# Altium PCB NetworkModule_highspeed V3.PcbDoc (part 1 of 3)
Units mm, origin at the board's own origin, x right, y up, seen from the top; angles counter-clockwise.
Board outline 21 x 36.1 mm, 6 copper layers (Top, GND, Inner3, Inner4, PWR, Bottom), stack 0.74 mm thick; 111 components, 125 nets, 539 pads, 397 vias.
Unrouted connection lines stored in the file: 274.
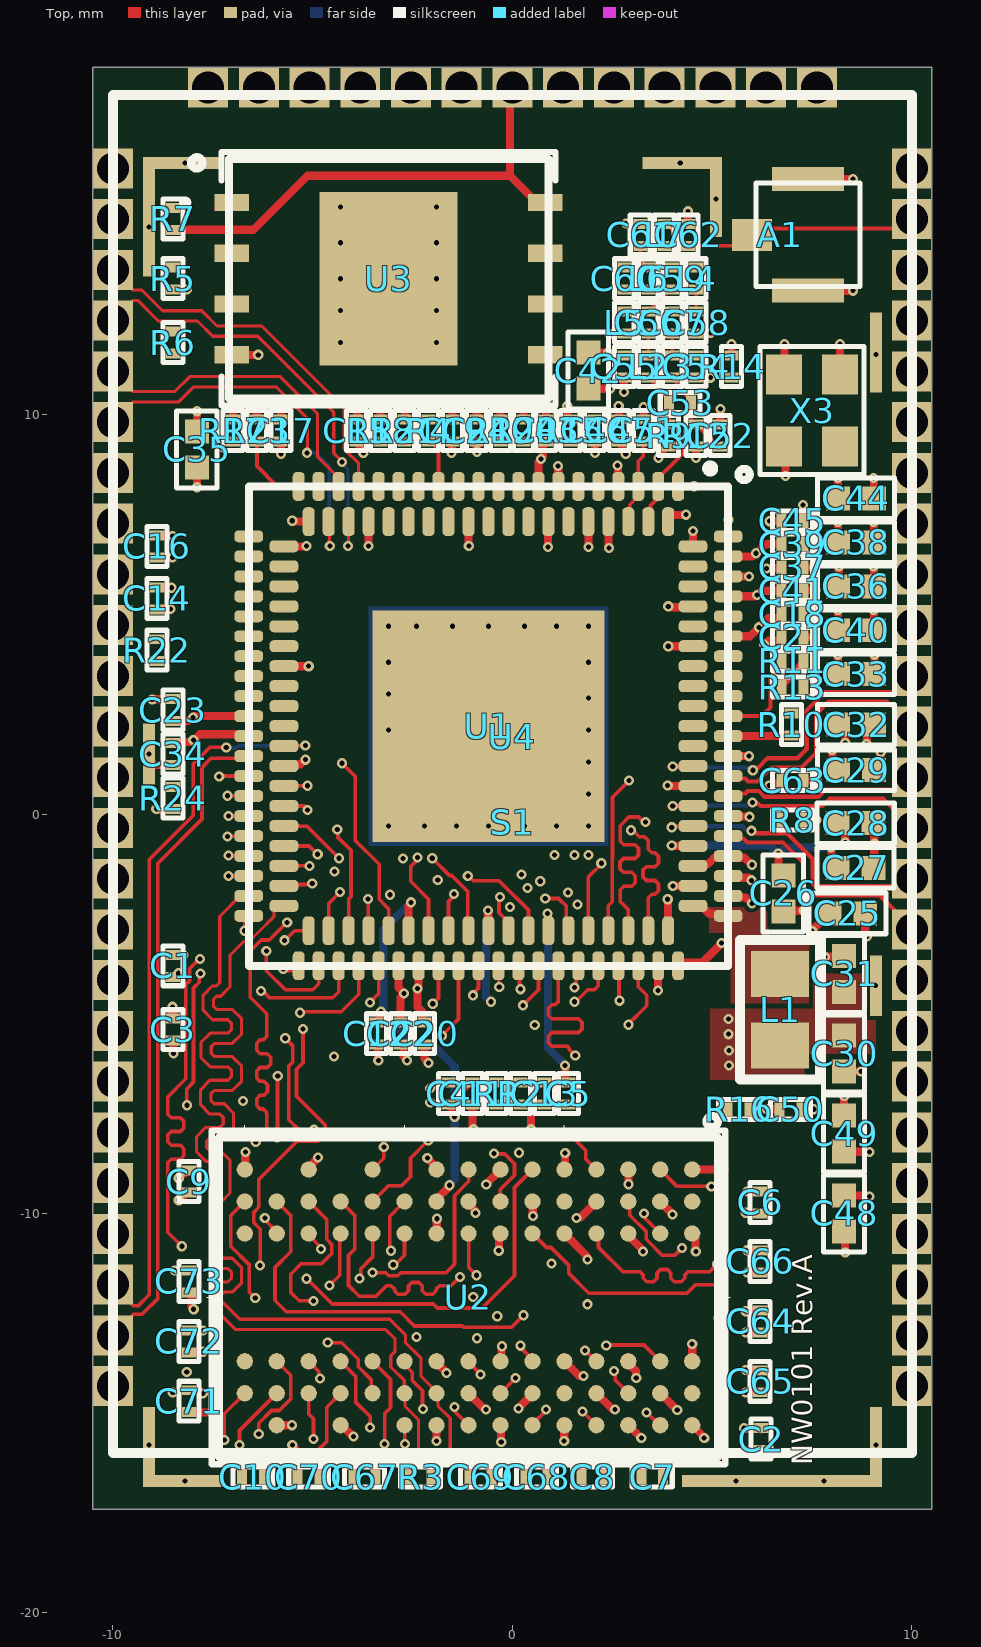
[diagram p0: Top view]
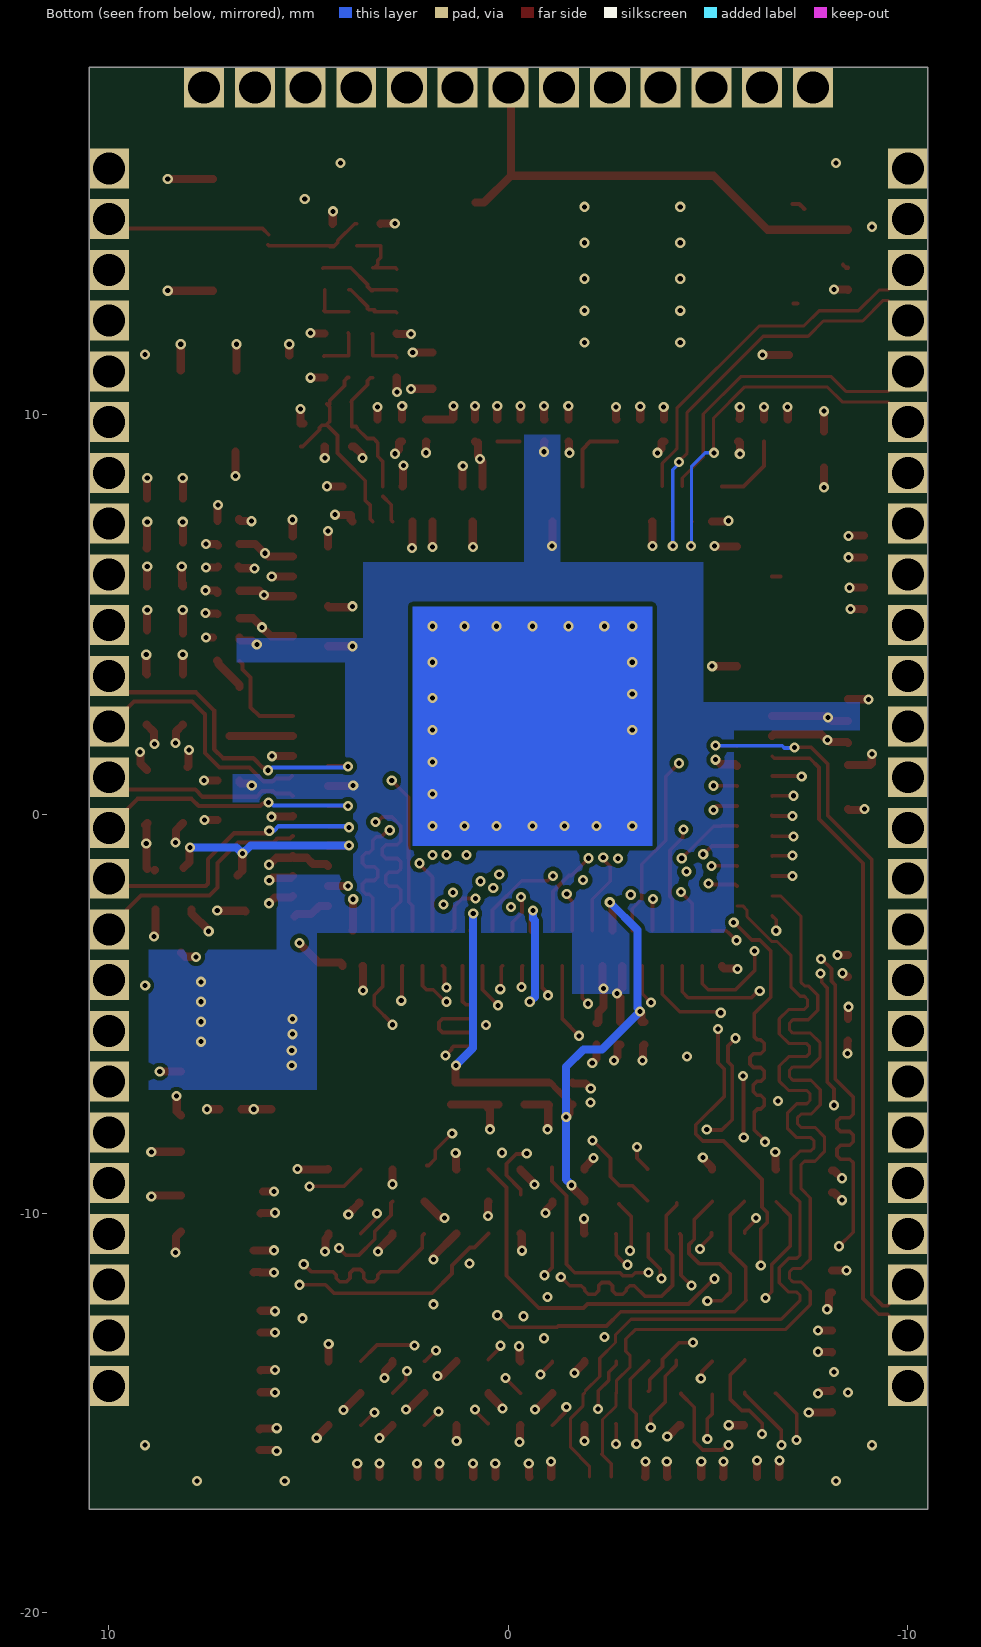
[diagram p1: Bottom view, seen from below]
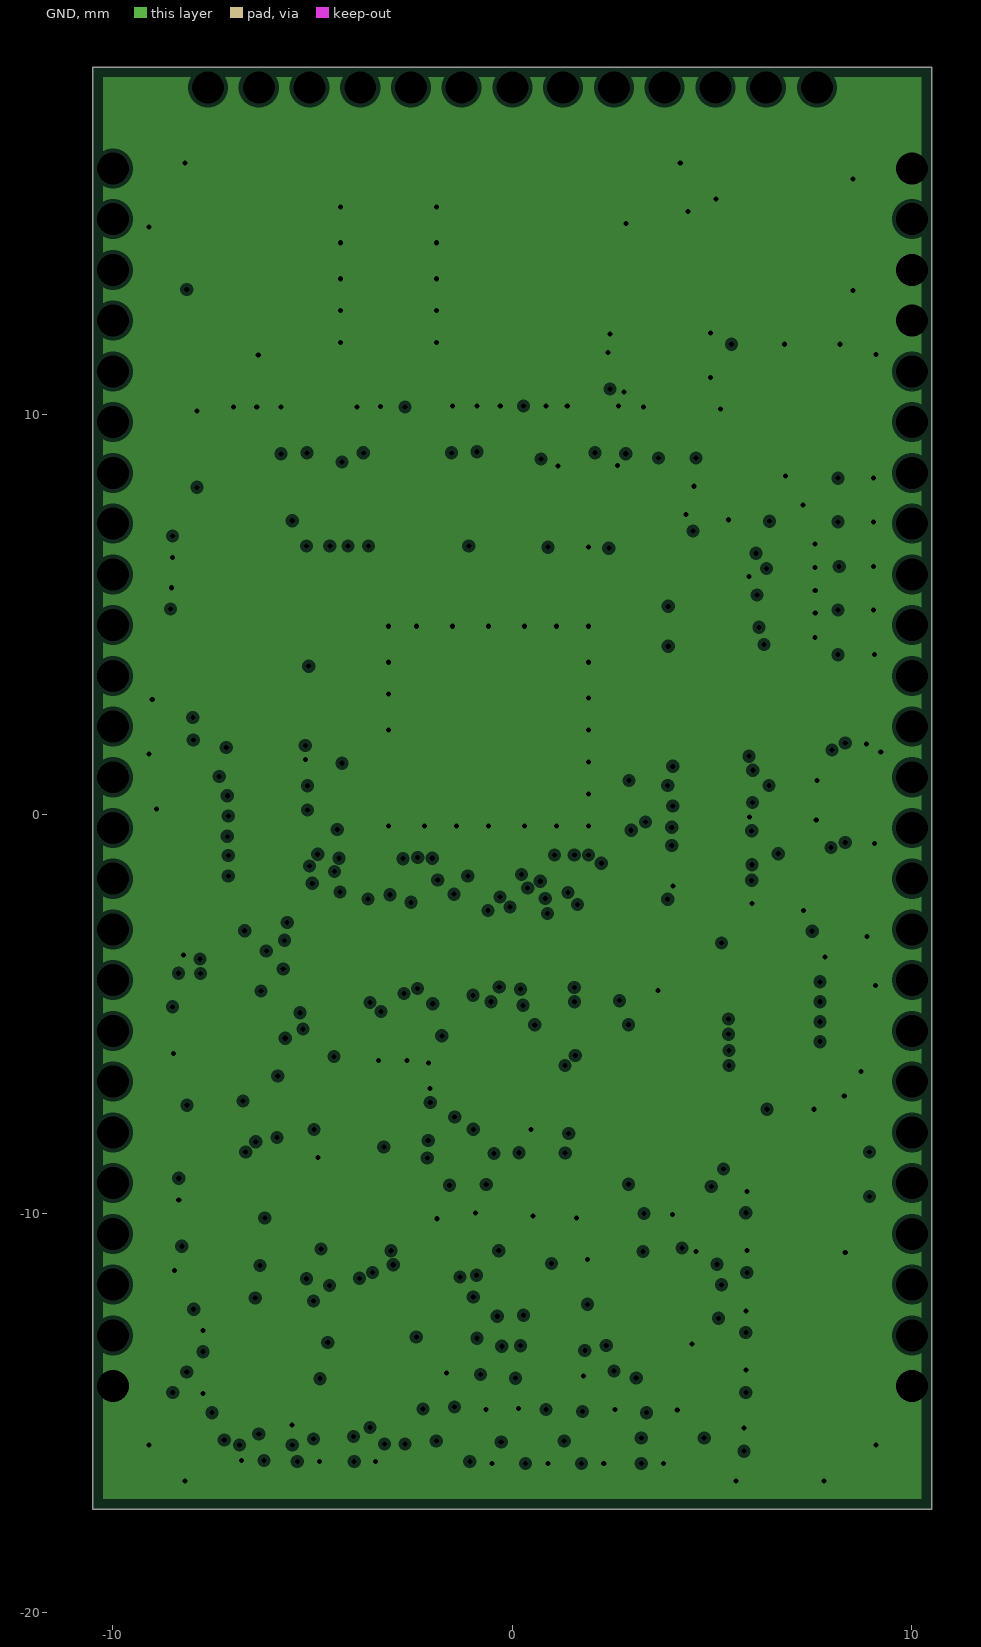
[diagram p2: GND, clearances drawn from the general rule]
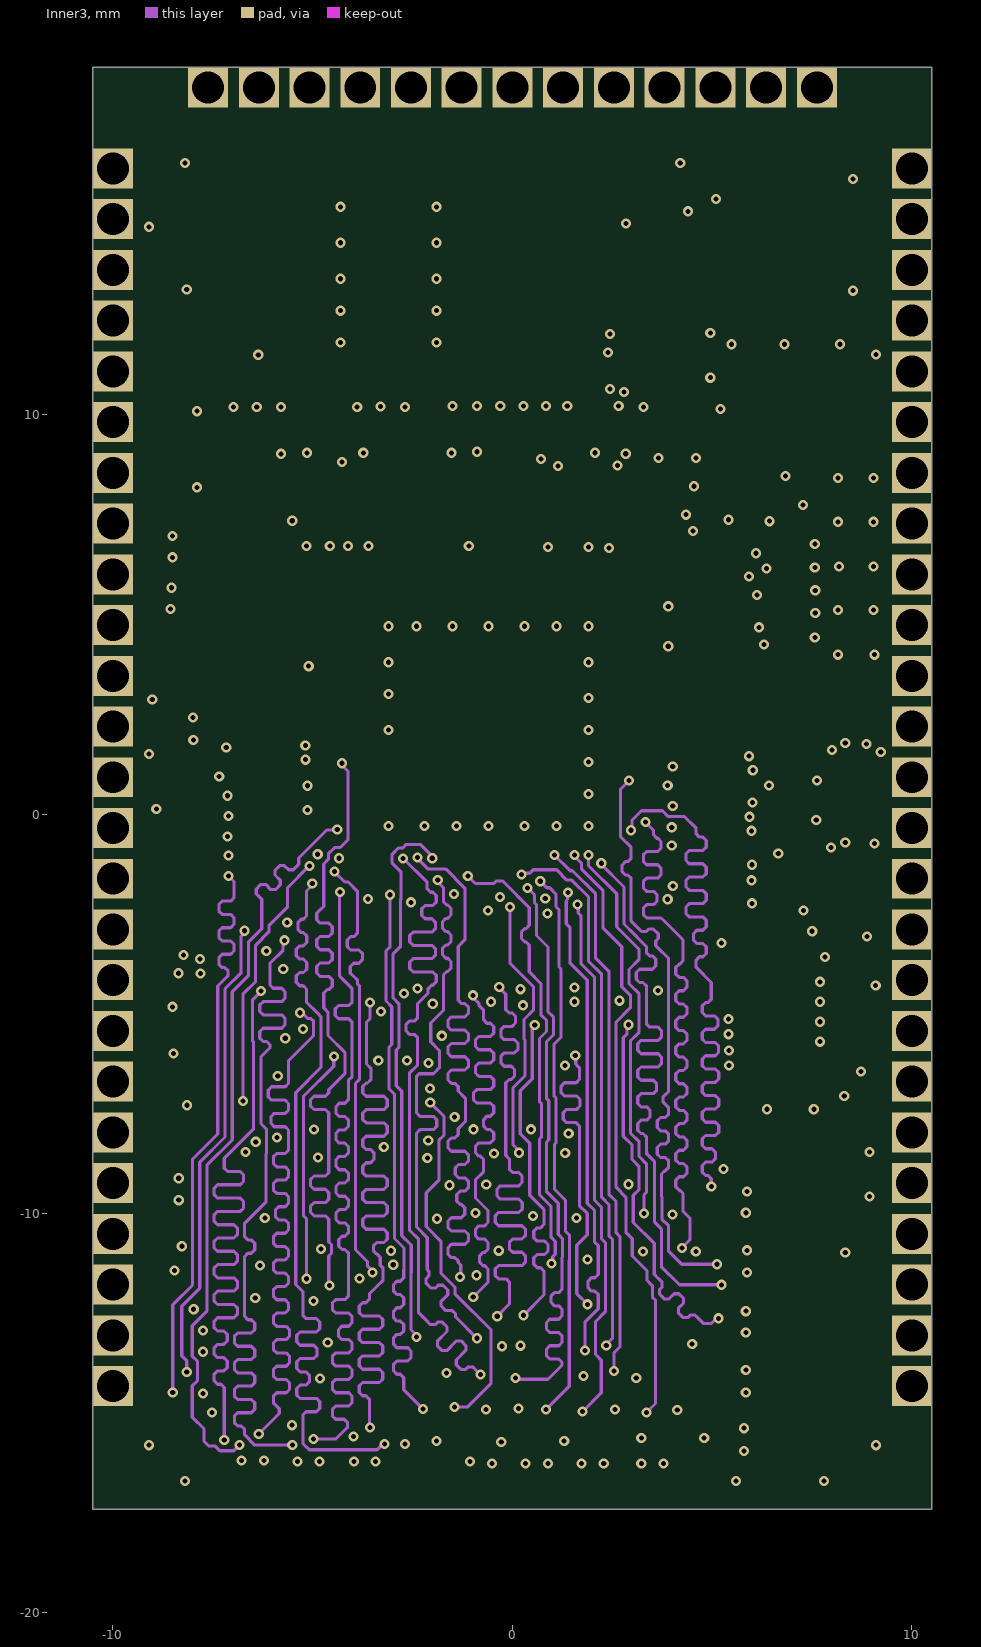
[diagram p3: Inner3]
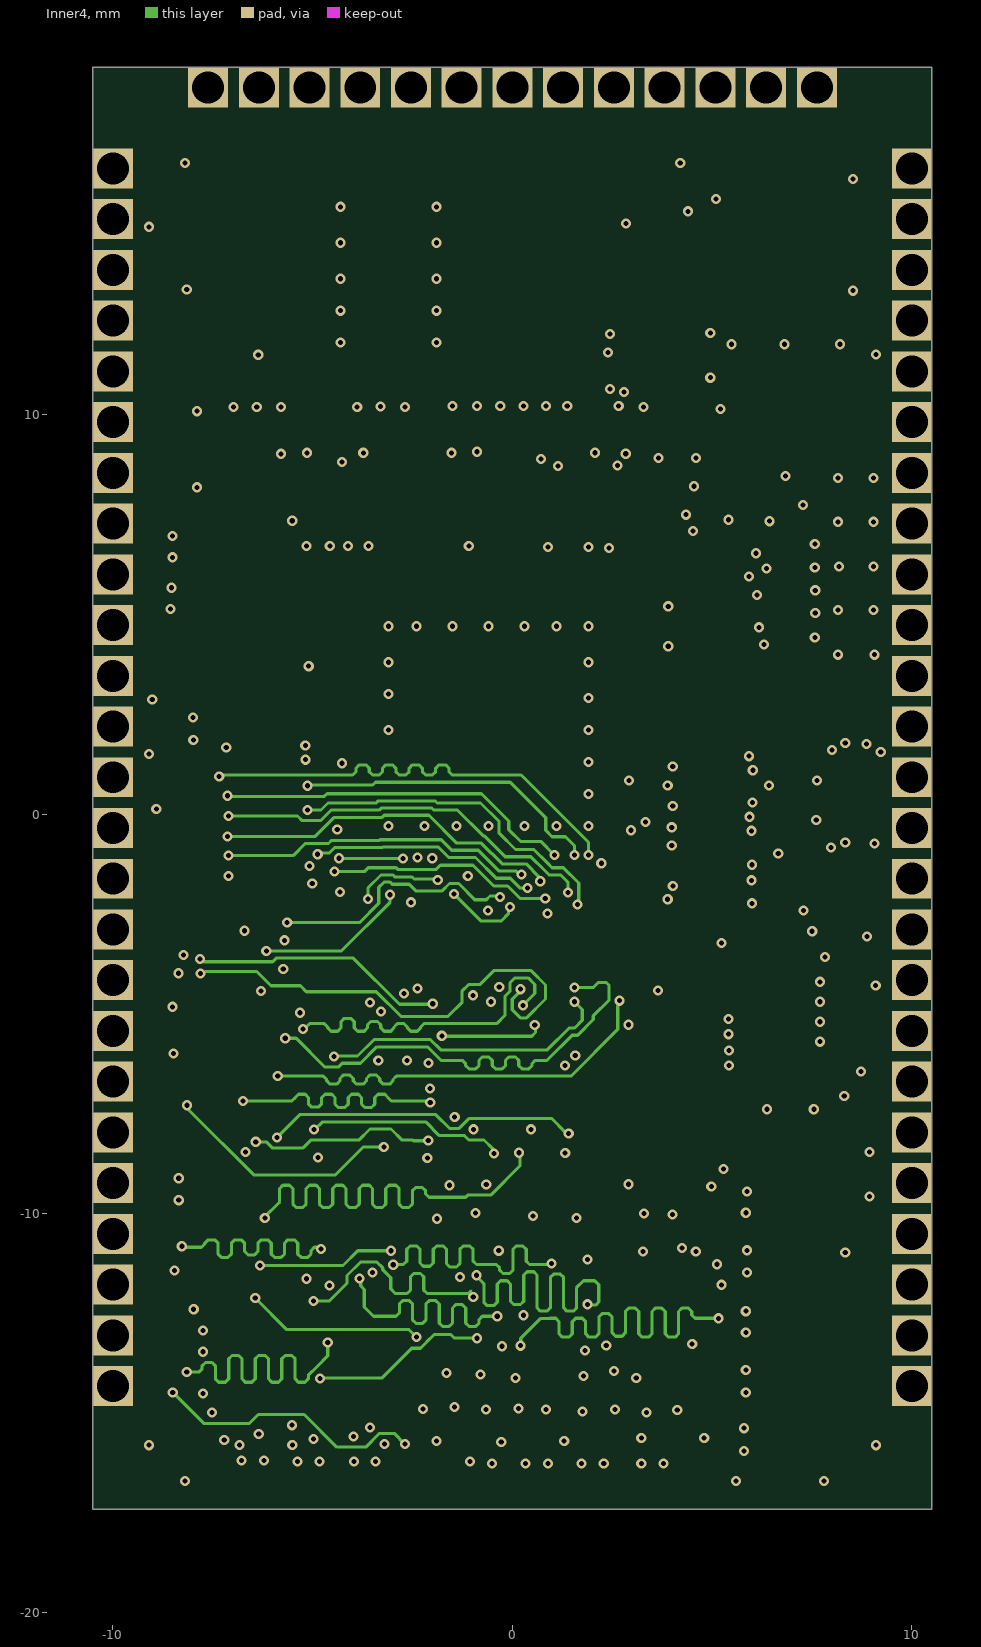
[diagram p4: Inner4]
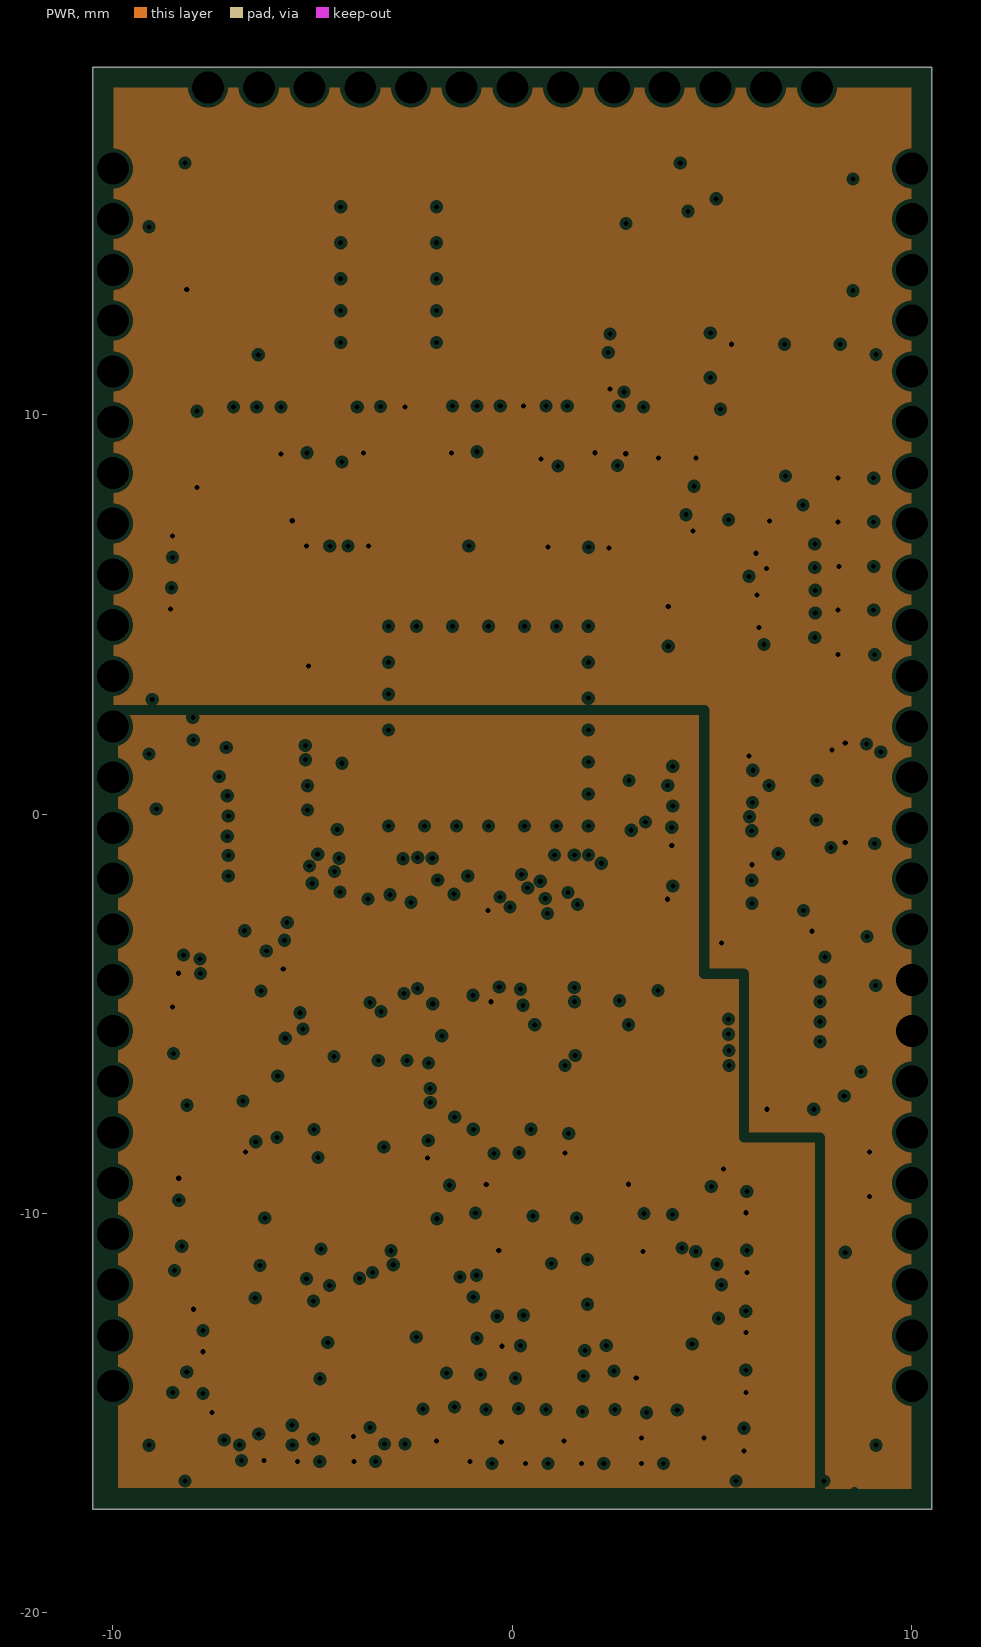
[diagram p5: PWR, clearances drawn from the general rule]

## Layer stack, top to bottom
Solder Mask Top: solder mask 0.0102, Solder Resist, Dk 3.5
Top: signal copper 0.0343
Dielectric 1: dielectric 0.06, FR-4, Dk 4.3
GND: plane copper 0.035, net GND
Dielectric2: dielectric 0.0787, FR-4, Dk 4.3
Inner3: signal copper 0.035
Dielectric3: dielectric 0.254, FR-4, Dk 4.3
Inner4: signal copper 0.035
Dielectric4: dielectric 0.0787, FR-4, Dk 4.3
PWR: plane copper 0.035, net 3V3
Dielectric5: dielectric 0.06, FR-4, Dk 4.3
Bottom: signal copper 0.0343
Solder Mask Bottom: solder mask 0.0102, Solder Resist, Dk 3.5

## Board outline
-10.5,18.7 10.5,18.7 10.5,-17.4 -10.5,-17.4

## Design rules (kind name [scope] priority, off if disabled: settings)
BoardOutlineClearance [All] p1: gap=0.102 ignorepadtopadclearanceinfootprint=FALSE
Clearance "Clearance - Default - DEFAULT - Net" [All] p1: gap=0.102 ignorepadtopadclearanceinfootprint=FALSE
ComponentClearance [All] p1: gap=0 collisioncheckmode=3 verticalgap=0 showdistances=FALSE
DiffPairsRouting "DiffPairsRouting - DiffPair - DDRCLK" [InDifferentialPair('DDRCLK')] p1: maxlimit=0.178 minlimit=0.127 mostfreqgap=0.127 toplayer_mingap=0.178 toplayer_prefgap=0.178 toplayer_minwidth=0.079 toplayer_maxwidth=0.079 toplayer_prefwidth=0.079 impedanceprofiledriven=TRUE impedanceprofileid={2A60CAE8-979D-4617-9CAD-F7D18D3C7651} impedanceprofilevalue=100.000000 maxuncoupledlength=12.7
DiffPairsRouting "DiffPairsRouting - DiffPair - ETH_R" [InDifferentialPair('ETH_R') or InDifferentialPair('ETH_T')] p2: maxlimit=0.178 minlimit=0.127 mostfreqgap=0.178 toplayer_mingap=0.178 toplayer_minwidth=0.079 toplayer_maxwidth=0.079 toplayer_prefwidth=0.079 bottomlayer_mingap=0.178 bottomlayer_minwidth=0.079 bottomlayer_maxwidth=0.079 bottomlayer_prefwidth=0.079 impedanceprofiledriven=TRUE impedanceprofileid={F7A5DDC0-C5B1-46B8-8866-6746753CC466} impedanceprofilevalue=100.000000 maxuncoupledlength=12.7
DiffPairsRouting "DiffPairsRouting - DiffPair - USB_D" [InDifferentialPair('USB')] p3: maxlimit=0.127 minlimit=0.114 mostfreqgap=0.127 toplayer_mingap=0.127 toplayer_minwidth=0.091 toplayer_maxwidth=0.091 toplayer_prefwidth=0.091 impedanceprofiledriven=TRUE impedanceprofileid={C5FCCC38-FD2C-4A72-8F5C-545B132D70D5} impedanceprofilevalue=90.000000 maxuncoupledlength=12.7
DiffPairsRouting "DiffPairsRouting - DiffPair - PCIE" [InDifferentialPair('PCIE_R') or InDifferentialPair('PCIE_T') or InDifferentialPair('PCIE_CLK')] p4: maxlimit=0.127 minlimit=0.102 mostfreqgap=0.127 toplayer_mingap=0.127 toplayer_minwidth=0.104 toplayer_maxwidth=0.104 toplayer_prefwidth=0.104 bottomlayer_mingap=0.127 bottomlayer_minwidth=0.104 bottomlayer_maxwidth=0.104 bottomlayer_prefwidth=0.104 impedanceprofiledriven=TRUE impedanceprofileid={683894AC-71DA-4711-AA13-E03A25D4E6CD} impedanceprofilevalue=85.000000 maxuncoupledlength=12.7
HoleSize [All] p1: absolutevalues=TRUE maxlimit=2.54 minlimit=0.127 maxpercent=80.000 minpercent=20.000
HoleToHoleClearance "HoleToHoleClearance - Default - DEFAULT" [All] p1: gap=0.102 allowstackedmicrovias=TRUE
MatchedLengths [InNetClass('DDR')] p1: tolerance=2.54 checknetsindiffpair=FALSE checkdiffpairvsdiffpair=TRUE checkxsignals=TRUE checkothers=TRUE
MinimumSolderMaskSliver [All] p1: minsoldermaskwidth=0.076
PlaneClearance [All] p1: clearance=0.102
PlaneConnect "Default PlaneConnect" [All] p1: planeconnectstyle=Direct reliefexpansion=0.508 reliefentries=4 reliefconductorwidth=0.381 reliefairgap=0.254
PolygonConnect "PolygonConnect - Default SMT" [IsSMTPin] p1: connectstyle=Direct reliefconductorwidth=0.254 reliefentries=4 polygonreliefangle="45 Angle" airgapwidth=0.254
PolygonConnect "PolygonConnect - Default Pad" [All] p2: connectstyle=Direct reliefconductorwidth=0.381 reliefentries=4 polygonreliefangle="45 Angle" airgapwidth=0.254
ReturnPath "ReturnPath - DDRCLK" [InNetClass('DDRCLK')] p1: impedanceprofileid={2A60CAE8-979D-4617-9CAD-F7D18D3C7651} _gaplimit=0
ReturnPath ReturnPath-DDR [All] p2: impedanceprofileid={722ABB41-7FFB-403E-9E2B-BB6A49F0BD66} _gaplimit=0
ReturnPath "ReturnPath - RF" [All] p3: impedanceprofileid={3401BA53-1A97-405B-B9A4-8C0F8181F371} _gaplimit=0
ReturnPath "ReturnPath - USB" [All] p4: impedanceprofileid={C5FCCC38-FD2C-4A72-8F5C-545B132D70D5} _gaplimit=0
ReturnPath "ReturnPath - PCIE" [All] p5: impedanceprofileid={683894AC-71DA-4711-AA13-E03A25D4E6CD} _gaplimit=0
ReturnPath "ReturnPath - Eth" [InNetClass('ETH')] p6: impedanceprofileid={F7A5DDC0-C5B1-46B8-8866-6746753CC466} _gaplimit=0.127
RoutingLayers "RoutingLayers - USB" [InNetClass('USB')] p1: top layer_v5=TRUE mid layer 1_v5=FALSE mid layer 2_v5=FALSE bottom layer_v5=TRUE
RoutingLayers "RoutingLayers - PCIE" [InNetClass('PCIE')] p2: top layer_v5=TRUE mid layer 1_v5=FALSE mid layer 2_v5=FALSE bottom layer_v5=TRUE
RoutingLayers "RoutingLayers - DDRCLK" [InNetClass('DDRCLK')] p3: top layer_v5=TRUE mid layer 1_v5=TRUE mid layer 2_v5=TRUE bottom layer_v5=TRUE
RoutingLayers "RoutingLayers - NetClass - RF" [InNetClass('RF')] p4: top layer_v5=TRUE mid layer 1_v5=FALSE mid layer 2_v5=FALSE bottom layer_v5=FALSE
RoutingLayers "RoutingLayers - NetClass - DDR" [InNetClass('DDR')] p5: top layer_v5=TRUE mid layer 1_v5=TRUE mid layer 2_v5=TRUE bottom layer_v5=TRUE
RoutingLayers "RoutingLayers - ETH" [InNetClass('ETH')] p6: top layer_v5=TRUE mid layer 1_v5=FALSE mid layer 2_v5=FALSE bottom layer_v5=TRUE
RoutingLayers "RoutingLayers - NetClass - Power" [InNetClass('Power')] p7: top layer_v5=TRUE mid layer 1_v5=FALSE mid layer 2_v5=FALSE bottom layer_v5=TRUE
RoutingLayers "RoutingLayers - Net - GND" [InNet('GND')] p8: top layer_v5=TRUE mid layer 1_v5=FALSE mid layer 2_v5=FALSE bottom layer_v5=FALSE
RoutingLayers "RoutingLayers - Default" [All] p9: top layer_v5=TRUE mid layer 1_v5=TRUE mid layer 2_v5=TRUE bottom layer_v5=TRUE
RoutingPriority "RoutingPriority - PCIE" [InNetClass('PCIE')] p1: routingpriority=5
RoutingPriority "RoutingPriority - USB" [InNetClass('USB')] p2: routingpriority=5
RoutingPriority "RoutingPriority - ETH" [InNetClass('ETH')] p3: routingpriority=5
RoutingPriority "RoutingPriority - DDRCLK" [InNetClass('DDRCLK')] p4: routingpriority=5
RoutingPriority "RoutingPriority - DDR" [InNetClass('DDR')] p5: routingpriority=3
RoutingPriority "RoutingPriority - Default" [All] p6: routingpriority=0
RoutingVias "RoutingVias - Default" [All] p1: holewidth=0.102 width=0.254 viastyle="Through Hole" minholewidth=0.102 minwidth=0.254 maxholewidth=0.102 maxwidth=0.254
SolderMaskExpansion "SolderMaskExpansion from CAM settings" [All] p1: expansion=0.051 istentingtop=FALSE
Width "Width - NetClass -RF" [InNetClass('RF')] p1: maxlimit=0.152 minlimit=0.076 preferedwidth=0.254 toplayer_prefwidth=0.092 impedanceprofiledriven=TRUE impedanceprofileid={3401BA53-1A97-405B-B9A4-8C0F8181F371} impedanceprofilevalue=50.000000 minimp=50.000000 maximp=50.000000 favimp=50.000000
Width "Width - NetClass - DDR" [InNetClass('DDR')] p2: maxlimit=0.152 minlimit=0.076 preferedwidth=0.092 toplayer_minwidth=0.092 toplayer_maxwidth=0.092 midlayer1_minwidth=0.079 midlayer1_maxwidth=0.079 midlayer1_prefwidth=0.079 midlayer2_minwidth=0.078 midlayer2_maxwidth=0.078 midlayer2_prefwidth=0.078 impedanceprofiledriven=TRUE impedanceprofileid={722ABB41-7FFB-403E-9E2B-BB6A49F0BD66} impedanceprofilevalue=50.000000 minimp=50.000000 maximp=50.000000 favimp=50.000000
Width "Width - Net - GND" [InNet('GND')] p3: maxlimit=0.254 minlimit=0.102 preferedwidth=0.203 minimp=50.000000 maximp=50.000000 favimp=50.000000
Width "Width - NetClass - Power" [InNetClass('Power')] p4: maxlimit=0.254 minlimit=0.102 preferedwidth=0.203 minimp=50.000000 maximp=50.000000 favimp=50.000000
Width "Width - DEFAULT" [All] p5: maxlimit=0.254 minlimit=0.076 preferedwidth=0.102 minimp=50.000000 maximp=50.000000 favimp=50.000000
21 further rules are at their usual default settings.

## Classes and differential pairs
component class BGA: U2
net class DDRCLK: DDR_CLK_N DDR_CLK_P
net class ETH: ETH_RN ETH_RP ETH_TN ETH_TP
net class PCIE: PCIE_CKN PCIE_CKP PCIE_RXN PCIE_RXP PCIE_TXN PCIE_TXP
net class USB: USB_D+ USB_D-
net class DDR: DDR_A0 DDR_A1 DDR_A2 DDR_A3 DDR_A4 DDR_A5 DDR_A6 DDR_A7 DDR_A8 DDR_A9 DDR_A10 DDR_A11 DDR_A12 DDR_A13 DDR_BA0 DDR_BA1 DDR_BA2 DDR_CAS DDR_CKE DDR_CS DDR_D0 DDR_D1 DDR_D2 DDR_D3 DDR_D4 DDR_D5 DDR_D6 DDR_D7 DDR_D8 DDR_D9 DDR_D10 DDR_D11 DDR_D12 DDR_D13 DDR_D14 DDR_D15 DDR_LDM DDR_LDQS DDR_ODT DDR_RAS DDR_UDM DDR_UDQS DDR_WE
net class RF: ANT_OUT RF_DIFF+ RF_DIFF- RF_HP+ RF_HP- RF_LP RF_LP+ RF_LP- RF_NOTCH
net class Power: 1V2 1V8 3V3 DDR_1V8 DDR_VREF LXBK VDD_FLASH
component class WIFI: A1 C36 C37 C38 C39 C40 C41 C42 C43 C44 C45 C46 C47 C48 C49 C50 C51 C52 C53 C54 C55 C56 C57 C58 C59 C60 C61 C62 L2 L3 L4 L5 L6 L7 R9 R12 X3
component class USB_PCIE: C32 C33 C34 C35 C63 R16 R24
component class POWER: C18 C19 C20 C21 C22 C23 C24 C25 C27 C28 C29 C30 C31 L1 U1
component class MISC: R4 R5 R7 R8 R10 R11 R13 R14 R15 R17 R18 R19 R20 R21 U3
component class MEMORY: C1 C2 C3 C5 C6 C7 C8 C9 C10 C11 C64 C65 C66 C67 C68 C69 C70 C71 C72 C73 R1 R2 R3 U2
component class INTERFACE: U4
component class ETH_JTAG_SD: C14 C15 C16 C17 R22 R23
differential pair PCIE_CLK: +PCIE_CKP -PCIE_CKN
differential pair PCIE_R: +PCIE_RXP -PCIE_RXN
differential pair PCIE_T: +PCIE_TXP -PCIE_TXN
differential pair DDRCLK: +DDR_CLK_P -DDR_CLK_N
differential pair ETH_R: +ETH_RP -ETH_RN
differential pair ETH_T: +ETH_TP -ETH_TN
differential pair USB: +USB_D+ -USB_D-

## Components (designator, comment, footprint, x,y, rotation, side; value= is the part's Value field where it differs from the comment)
A1 "CONMHF1-SMD-G-T" CONMHF1-SMD-G-T 7.4,14.5 r0 top locked
C1 "CAP0201-104-16V-X7R" RC0201 -8.5,-3.8 r90 top value="0.1uF 16V X7R"
C2 "CAP0201-104-16V-X7R" RC0201 6.225,-15.65 r90 top value="0.1uF 16V X7R"
C3 "CAP0201-104-16V-X7R" RC0201 -8.5,-5.4 r270 top value="0.1uF 16V X7R"
C4 "CAP0201-104-16V-X7R" RC0201 -1.6,-7 r90 top value="0.1uF 16V X7R"
C5 "CAP0201-104-16V-X7R" RC0201 1.4,-7 r270 top value="0.1uF 16V X7R"
C6 "CAP0201-104-16V-X7R" RC0201 6.2,-9.725 r90 top value="0.1uF 16V X7R"
C7 "CAP0201-104-16V-X7R" RC0201 3.5,-16.6 r0 top value="0.1uF 16V X7R"
C8 "CAP0201-104-16V-X7R" RC0201 2,-16.6 r0 top value="0.1uF 16V X7R"
C9 "CAP0201-104-16V-X7R" RC0201 -8.1,-9.2 r270 top value="0.1uF 16V X7R"
C10 "CAP0201-104-16V-X7R" RC0201 -6.5,-16.6 r180 top value="0.1uF 16V X7R"
C11 "CAP0201-104-16V-X7R" RC0201 -1,-7 r90 top value="0.1uF 16V X7R"
C12 "CAP0201-104-16V-X7R" RC0201 -3.4,-5.5 r270 top value="0.1uF 16V X7R"
C13 "CAP0201-104-16V-X7R" RC0201 0.8,-7 r270 top value="0.1uF 16V X7R"
C14 "CAP0201-104-16V-X7R" RC0201 -8.9,5.4 r90 top value="0.1uF 16V X7R"
C15 "CAP0201-104-16V-X7R" RC0201 -3.9,9.6 r90 top value="0.1uF 16V X7R"
C16 "CAP0201-104-16V-X7R" RC0201 -8.9,6.7 r270 top value="0.1uF 16V X7R"
C17 "CAP0201-104-16V-X7R" RC0201 -5.8,9.6 r90 top value="0.1uF 16V X7R"
C18 "CAP0201-104-16V-X7R" RC0201 7.01,5.004 r0 top value="0.1uF 16V X7R"
C19 "CAP0201-104-16V-X7R" RC0201 -1.5,9.6 r90 top value="0.1uF 16V X7R"
C20 "CAP0201-104-16V-X7R" RC0201 -2.2,-5.5 r270 top value="0.1uF 16V X7R"
C21 "CAP0201-104-16V-X7R" RC0201 7.01,4.42 r0 top value="0.1uF 16V X7R"
C22 "CAP0201-104-16V-X7R" RC0201 -2.8,-5.5 r270 top value="0.1uF 16V X7R"
C23 "CAP0201-104-16V-X7R" RC0201 -8.5,2.6 r90 top value="0.1uF 16V X7R"
C24 "CAP0201-104-16V-X7R" RC0201 -0.9,9.6 r90 top value="0.1uF 16V X7R"
C25 "CAP0402-105-6.3V-X7R" RC0402 8.382,-2.489 r0 top value="1uF 16V X7R"
C26 "CAP0402-475-10V-X5R" RC0402 6.782,-1.988 r270 top value="4.7uF 10V X5R"
C27 "CAP0402-105-6.3V-X7R" RC0402 8.585,-1.346 r0 top value="1uF 16V X7R"
C28 "CAP0402-105-6.3V-X7R" RC0402 8.592,-0.229 r0 top value="1uF 16V X7R"
C29 "CAP0402-105-6.3V-X7R" RC0402 8.6,1.1 r0 top value="1uF 16V X7R"
C30 "CAP0402-475-10V-X5R" RC0402 8.3,-6 r270 top value="4.7uF 10V X5R"
C31 "CAP0402-475-10V-X5R" RC0402 8.3,-4 r90 top value="4.7uF 10V X5R"
C32 "CAP0402-475-10V-X5R" RC0402 8.603,2.235 r0 top value="4.7uF 10V X5R"
C33 "CAP0402-475-10V-X5R" RC0402 8.6,3.5 r0 top value="4.7uF 10V X5R"
C34 "CAP0201-104-16V-X7R" RC0201 -8.5,1.5 r270 top value="0.1uF 16V X7R"
C35 "CAP0402-475-10V-X5R" RC0402 -7.899,9.126 r90 top value="4.7uF 10V X5R"
C36 "CAP0402-105-6.3V-X7R" RC0402 8.6,5.7 r0 top value="1uF 16V X7R"
C37 "CAP0201-101-16V-X7R" RC0201 7.01,6.172 r0 top value="100pF 16V X7R"
C38 "CAP0402-105-6.3V-X7R" RC0402 8.6,6.8 r0 top value="1uF 16V X7R"
C39 "CAP0201-101-16V-X7R" RC0201 7.01,6.756 r0 top value="100pF 16V X7R"
C40 "CAP0402-105-6.3V-X7R" RC0402 8.6,4.6 r0 top value="1uF 16V X7R"
C41 "CAP0201-101-16V-X7R" RC0201 7.01,5.588 r0 top value="100pF 16V X7R"
C42 "CAP0402-105-6.3V-X7R" RC0402 1.9,11.1 r90 top value="1uF 16V X7R"
C43 "CAP0201-101-16V-X7R" RC0201 0.838,9.601 r90 top value="100pF 16V X7R"
C44 "CAP0402-105-6.3V-X7R" RC0402 8.6,7.9 r0 top value="1uF 16V X7R"
C45 "CAP0201-101-16V-X7R" RC0201 7.01,7.341 r0 top value="100pF 16V X7R"
C46 "CAP0201-101-16V-X7R" RC0201 2.057,9.601 r90 top value="100pF 16V X7R"
C47 "CAP0201-101-16V-X7R" RC0201 2.667,9.601 r90 top value="100pF 16V X7R"
C48 "CAP0402-105-6.3V-X7R" RC0402 8.3,-10 r270 top value="1uF 16V X7R"
C49 "CAP0402-475-10V-X5R" RC0402 8.3,-8 r90 top value="4.7uF 10V X5R"
C50 "CAP0201-100-25V-NP0" RC0201 6.96,-7.391 r0 top value="10pF 25V NP0"
C51 "CAP0201-020-25V-NP0" RC0201 3.277,9.601 r270 top value="2pF 25V NP0"
C52 "CAP0201-020-25V-NP0" RC0201 5.2,9.474 r90 top value="2pF 25V NP0"
C53 "CAP0201-NOP" RC0201 4.2,10.3 r0 top value=NOP
C54 "CAP0201-NOP" RC0201 4.6,11.2 r270 top value=NOP
C55 "CAP0201-NOP" RC0201 2.8,11.2 r270 top value=NOP
C56 "CAP0201-100-25V-NP0" RC0201 3.4,12.3 r270 top value="10pF 25V NP0"
C57 "CAP0201-100-25V-NP0" RC0201 4,12.3 r270 top value="10pF 25V NP0"
C58 "CAP0201-1R2-25V-NP0" RC0201 4.6,12.3 r270 top value="1.2PF 25V NP0"
C59 "CAP0201-1R2-25V-NP0" RC0201 4,13.4 r270 top value="1.2PF 25V NP0"
C60 "CAP0201-090-100V-NP0" RC0201 2.8,13.4 r270 top value="9pF 25V NP0"
C61 "CAP0201-020-25V-NP0" RC0201 3.2,14.5 r90 top value="2pF 25V NP0"
C62 "CAP0201-020-25V-NP0" RC0201 4.4,14.5 r90 top value="2pF 25V NP0"
C63 "CAP0201-104-16V-X7R" RC0201 7.01,0.838 r180 top value="0.1uF 16V X7R"
C64 "CAP0201-104-16V-X7R" RC0201 6.2,-12.7 r90 top value="0.1uF 16V X7R"
C65 "CAP0201-104-16V-X7R" RC0201 6.2,-14.2 r90 top value="0.1uF 16V X7R"
C66 "CAP0201-104-16V-X7R" RC0201 6.2,-11.2 r90 top value="0.1uF 16V X7R"
C67 "CAP0201-104-16V-X7R" RC0201 -3.7,-16.6 r0 top value="0.1uF 16V X7R"
C68 "CAP0201-104-16V-X7R" RC0201 0.6,-16.6 r0 top value="0.1uF 16V X7R"
C69 "CAP0201-104-16V-X7R" RC0201 -0.8,-16.6 r0 top value="0.1uF 16V X7R"
C70 "CAP0201-104-16V-X7R" RC0201 -5.1,-16.6 r0 top value="0.1uF 16V X7R"
C71 "CAP0201-104-16V-X7R" RC0201 -8.1,-14.7 r90 top value="0.1uF 16V X7R"
C72 "CAP0201-104-16V-X7R" RC0201 -8.1,-13.2 r90 top value="0.1uF 16V X7R"
C73 "CAP0201-104-16V-X7R" RC0201 -8.1,-11.7 r90 top value="0.1uF 16V X7R"
L1 "IND0805_2.2U_1.9A" RC0805 6.7,-4.9 r270 top value="2.2uH 1.9A"
L2 "IND0201_1.5N_600MA" RC0201 3.4,11.2 r90 top value=1.5nH
L3 "IND0201_1.5N_600MA" RC0201 4,11.2 r90 top value=1.5nH
L4 "IND0201_2.5N_500MA" RC0201 4.6,13.4 r90 top value=2.5nH
L5 "IND0201_2.5N_500MA" RC0201 2.8,12.3 r270 top value=2.5nH
L6 "IND0201_1.8N_200MA" RC0201 3.4,13.4 r90 top value="1.8nH 200mA"
L7 "IND0201_1.5N_600MA" RC0201 3.8,14.5 r90 top value=1.5nH
R1 "RES0201-1K00" RC0201 -0.4,-7 r270 top value="1K00 1% 1/20W"
R2 "RES0201-1K00" RC0201 0.2,-7 r90 top value="1K00 1% 1/20W"
R3 "RES0201-100R" RC0201 -2.3,-16.6 r0 top value="100R 1% 1/20W"
R4 "RES0201-22R0" RC0201 -2.1,9.6 r90 top value="22R0 1% 1/20W"
R5 "RES0201-4K70" RC0201 -8.5,13.4 r270 top value="4K70 1% 1/20W"
R6 "RES0201-10K0" RC0201 -8.5,11.8 r270 top value="10K0 1% 1/20W"
R7 "RES0201-10K0" RC0201 -8.5,14.9 r270 top value="10K0 1% 1/20W"
R8 "RES0201-4K70" RC0201 7.01,-0.152 r180 top value="4K70 1% 1/20W"
R9 "RES0201-50R0" RC0201 3.912,9.474 r270 top value="50R 1% 0.075W"
R10 "RES0201-22R0" RC0201 6.985,2.235 r270 top value="22R0 1% 1/20W"
R11 "RES0201-22R0" RC0201 7.01,3.835 r0 top value="22R0 1% 1/20W"
R12 "RES0201-50R0" RC0201 4.6,9.474 r270 top value="50R 1% 0.075W"
R13 "RES0201-10K0" RC0201 7.008,3.175 r0 top value="10K0 1% 1/20W"
R14 "RES0201-4K70" RC0201 5.486,11.201 r90 top value="4K70 1% 1/20W"
R15 "RES0201-4K70" RC0201 1.448,9.601 r270 top value="4K70 1% 1/20W"
R16 "RES0201-10K0" RC0201 5.664,-7.391 r0 top value="10K0 1% 1/20W"
R17 "RES0201-4K70" RC0201 -7,9.6 r270 top value="4K70 1% 1/20W"
R18 "RES0201-4K70" RC0201 -3.3,9.6 r270 top value="4K70 1% 1/20W"
R19 "RES0201-NOP" RC0201 -0.3,9.6 r270 top value=NOP
R20 "RES0201-4K70" RC0201 0.279,9.601 r270 top value="4K70 1% 1/20W"
R21 "RES0201-4K70" RC0201 -2.7,9.6 r270 top value="4K70 1% 1/20W"
R22 "RES0201-22R0" RC0201 -8.9,4.1 r90 top value="22R0 1% 1/20W"
R23 "RES0201-24K3" RC0201 -6.4,9.6 r90 top value="24K3 1% 1/20W"
R24 "RES0201-5K10" RC0201 -8.5,0.4 r270 top value="5K10 1% 1/20W"
S1 "O2S-SHIELD" O2S-SHIELD 0.1,-0.1 r0 top locked
U1 "MT7688AN" DR-QFN-128 -0.6,2.2 r270 top locked
U2 "W971GG6KB" TWBGA-84_8X12P5_ISI -1.1,-12.1 r270 top locked
U3 "W25Q256" WIN_E-8_WIN -3.1,13.4 r0 top locked
U4 "OMEGA2S-PCB" OMEGA2S+PCB 0,6 r0 top locked
X3 "R2520-40.000-12-F-1010-TR-NS1" R2520-40.000-12-F-1010-TR-NS1 7.5,10.1 r270 top value=40Mhz

## Footprints (in the part's own frame and the unit in brackets; to place one, negate y for a bottom-side part, rotate by r counter-clockwise, add the part's x,y. Pads: shape width x height; smd on the part's side, far side on the other; paste and mask are expansions set on the pad)
CONMHF1-SMD-G-T [mm]
  rect 1x0.8 smd: 1(-1.4,0)
  rect 1.8x0.6 smd: 2(0,-1.4) 3(0,1.4)
  silkscreen extent -1.3,-1.3 1.3,1.3
DR-QFN-128 [mm]
  rrect70% 0.72x0.3 smd: 1(-6,4.75) 2(-5.12,4.5) 3(-6,4.25) 4(-5.12,4) 5(-6,3.75) 6(-5.12,3.5) 7(-6,3.25) 8(-5.12,3) 9(-6,2.75) 10(-5.12,2.5) 11(-6,2.25) 12(-5.12,2) 13(-6,1.75) 14(-5.12,1.5) 15(-6,1.25) 16(-5.12,1) 17(-6,0.75) 18(-5.12,0.5) 19(-6,0.25) 20(-5.12,0) 21(-6,-0.25) 22(-5.12,-0.5) 23(-6,-0.75) 24(-5.12,-1) 25(-6,-1.25) 26(-5.12,-1.5) 27(-6,-1.75) 28(-5.12,-2) 29(-6,-2.25) 30(-5.12,-2.5) 31(-6,-2.75) 32(-5.12,-3) 33(-6,-3.25) 34(-5.12,-3.5) 35(-6,-3.75) 36(-5.12,-4) 37(-6,-4.25) 38(-5.12,-4.5) 39(-6,-4.75)
  rrect70% 0.3x0.72 smd: 40(-4.75,-6) 41(-4.5,-5.12) 42(-4.25,-6) 43(-4,-5.12) 44(-3.75,-6) 45(-3.5,-5.12) 46(-3.25,-6) 47(-3,-5.12) 48(-2.75,-6) 49(-2.5,-5.12) 50(-2.25,-6) 51(-2,-5.12) 52(-1.75,-6) 53(-1.5,-5.12) 54(-1.25,-6) 55(-1,-5.12) 56(-0.75,-6) 57(-0.5,-5.12) 58(-0.25,-6) 59(0,-5.12) 60(0.25,-6) 61(0.5,-5.12) 62(0.75,-6) 63(1,-5.12) 64(1.25,-6) 65(1.5,-5.12) 66(1.75,-6) 67(2,-5.12) 68(2.25,-6) 69(2.5,-5.12) 70(2.75,-6) 71(3,-5.12) 72(3.25,-6) 73(3.5,-5.12) 74(3.75,-6) 75(4,-5.12) 76(4.25,-6) 77(4.5,-5.12) 78(4.75,-6) 118(4.75,6) 119(4.5,5.12) 120(4.25,6) 121(4,5.12) 122(3.75,6) 123(3.5,5.12) 124(3.25,6) 125(3,5.12) 126(2.75,6) 127(2.5,5.12) 128(2.25,6) 129(2,5.12) 130(1.75,6) 131(1.5,5.12) 132(1.25,6) 133(1,5.12) 134(0.75,6) 135(0.5,5.12) 136(0.25,6) 137(0,5.12) 138(-0.25,6) 139(-0.5,5.12) 140(-0.75,6) 141(-1,5.12) 142(-1.25,6) 143(-1.5,5.12) 144(-1.75,6) 145(-2,5.12) 146(-2.25,6) 147(-2.5,5.12) 148(-2.75,6) 149(-3,5.12) 150(-3.25,6) 151(-3.5,5.12) 152(-3.75,6) 153(-4,5.12) 154(-4.25,6) 155(-4.5,5.12) 156(-4.75,6)
  rrect70% 0.72x0.3 smd rot 179.99: 79(6,-4.75) 80(5.12,-4.5) 81(6,-4.25) 82(5.12,-4) 83(6,-3.75) 84(5.12,-3.5) 85(6,-3.25) 86(5.12,-3) 87(6,-2.75) 88(5.12,-2.5) 89(6,-2.25) 90(5.12,-2) 91(6,-1.75) 92(5.12,-1.5) 93(6,-1.25) 94(5.12,-1) 95(6,-0.75) 96(5.12,-0.5) 97(6,-0.25) 98(5.12,0) 99(6,0.25) 100(5.12,0.5) 101(6,0.75) 102(5.12,1) 103(6,1.25) 104(5.12,1.5) 105(6,1.75) 106(5.12,2) 107(6,2.25) 108(5.12,2.5) 109(6,2.75) 110(5.12,3) 111(6,3.25) 112(5.12,3.5) 113(6,3.75) 114(5.12,4) 115(6,4.25) 116(5.12,4.5) 117(6,4.75)
  rrect0% 5.8x5.8 smd: 157(0,0)
  silkscreen extent -6.55,-6 6,6.54
O2S-SHIELD [mm]
  rect 0.3x3 smd: 1(-9.2,15.05)
  rect 0.3x1.524 smd: 2(-9.2,1.6) 7(9,-4.2)
  rect 0.3x2 smd: 3(-9.2,-15.75) 6(9,-15.75) 8(9,11.65) 11(5,15.55)
  rect 2x0.3 smd: 4(-8.35,-16.6) 9(-8.35,16.4) 10(4.15,16.4)
  rect 5x0.3 smd: 5(6.65,-16.6)
OMEGA2S+PCB [mm]
  rrect0% 1x1 / inner rect 1x1 / far side rect 1x1 hole 0.8: A1(7.62,12.192) A2(6.35,12.192) A3(5.08,12.192) A4(3.81,12.192) A5(2.54,12.192) A6(1.27,12.192) A7(0,12.192) A8(-1.27,12.192) A9(-2.54,12.192) A10(-3.81,12.192) A11(-5.08,12.192) A12(-6.35,12.192) A13(-7.62,12.192) B1(-10,10.16) B2(-10,8.89) B3(-10,7.62) B4(-10,6.35) B5(-10,5.08) B6(-10,3.81) B7(-10,2.54) B8(-10,1.27) B9(-10,0) B10(-10,-1.27) B11(-10,-2.54) B12(-10,-3.81) B13(-10,-5.08) B14(-10,-6.35) B15(-10,-7.62) B16(-10,-8.89) B17(-10,-10.16) B18(-10,-11.43) B19(-10,-12.7) B20(-10,-13.97) B21(-10,-15.24) B22(-10,-16.51) B23(-10,-17.78) B24(-10,-19.05) B25(-10,-20.32) C1(10,10.16) C2(10,8.89) C3(10,7.62) C4(10,6.35) C5(10,5.08) C6(10,3.81) C7(10,2.54) C8(10,1.27) C9(10,0) C10(10,-1.27) C11(10,-2.54) C12(10,-3.81) C13(10,-5.08) C14(10,-6.35) C15(10,-7.62) C16(10,-8.89) C17(10,-10.16) C18(10,-11.43) C19(10,-12.7) C20(10,-13.97) C21(10,-15.24) C22(10,-16.51) C23(10,-17.78) C24(10,-19.05) C25(10,-20.32)
  silkscreen extent -10,-22 10,12
R2520-40.000-12-F-1010-TR-NS1 [mm]
  rect 1x0.9 smd: 1(-0.9,-0.7) 2(0.9,-0.7) 3(0.9,0.7) 4(-0.9,0.7)
  silkscreen extent -1.6,-1.3 1.6,1.3
RC0201 [mm]
  rect 0.25x0.35 smd: 1(-0.275,0) 2(0.275,0)
  silkscreen extent -0.5,-0.25 0.5,0.25
RC0402 [mm]
  rrect0% 0.6x0.6 smd: 1(-0.45,0) 2(0.45,0)
  silkscreen extent -0.97,-0.51 0.97,0.51
RC0805 [mm]
  rect 1.15x1.45 smd: 1(-0.9,0) 2(0.9,0)
  silkscreen extent -1.75,-1 1.75,1
TWBGA-84_8X12P5_ISI [mil]
  round 16 smd: A1(-125.98,220.47) A2(-94.49,220.47) A3(-62.99,220.47) A7(62.99,220.47) A8(94.49,220.47) A9(125.98,220.47) B1(-125.98,188.98) B2(-94.49,188.98) B3(-62.99,188.98) B7(62.99,188.98) B8(94.49,188.98) B9(125.98,188.98) C1(-125.98,157.48) C2(-94.49,157.48) C3(-62.99,157.48) C7(62.99,157.48) C8(94.49,157.48) C9(125.98,157.48) D1(-125.98,125.98) D2(-94.49,125.98) D3(-62.99,125.98) D7(62.99,125.98) D8(94.49,125.98) D9(125.98,125.98) E1(-125.98,94.49) E2(-94.49,94.49) E3(-62.99,94.49) E7(62.99,94.49) E8(94.49,94.49) E9(125.98,94.49) F1(-125.98,62.99) F2(-94.49,62.99) F3(-62.99,62.99) F7(62.99,62.99) F8(94.49,62.99) F9(125.98,62.99) G1(-125.98,31.5) G2(-94.49,31.5) G3(-62.99,31.5) G7(62.99,31.5) G8(94.49,31.5) G9(125.98,31.5) H1(-125.98,0) H2(-94.49,0) H3(-62.99,0) H7(62.99,0) H8(94.49,0) H9(125.98,0) J1(-125.98,-31.5) J2(-94.49,-31.5) J3(-62.99,-31.5) J7(62.99,-31.5) J8(94.49,-31.5) J9(125.98,-31.5) K2(-94.49,-62.99) K3(-62.99,-62.99) K7(62.99,-62.99) K8(94.49,-62.99) K9(125.98,-62.99) L1(-125.98,-94.49) L2(-94.49,-94.49) L3(-62.99,-94.49) L7(62.99,-94.49) L8(94.49,-94.49) M2(-94.49,-125.98) M3(-62.99,-125.98) M7(62.99,-125.98) M8(94.49,-125.98) M9(125.98,-125.98) N1(-125.98,-157.48) N2(-94.49,-157.48) N3(-62.99,-157.48) N7(62.99,-157.48) N8(94.49,-157.48) P2(-94.49,-188.98) P3(-62.99,-188.98) P7(62.99,-188.98) P8(94.49,-188.98) P9(125.98,-188.98) R1(-125.98,-220.47) R2(-94.49,-220.47) R3(-62.99,-220.47) R7(62.99,-220.47) R8(94.49,-220.47)
  silkscreen extent -179,-258 170,258
WIN_E-8_WIN [mil]
  rect 34x17 smd: 1(-154.5,75) 2(-154.5,25) 3(-154.5,-25) 4(-154.5,-75) 5(154.5,-75) 6(154.5,-25) 7(154.5,25) 8(154.5,75)
  rect 136x171 smd: 9(0,0)
  silkscreen extent -203,-125 164,125

## Part data
A1: "CONN UMC JACK STR SMD", Manufacturer="Linx Technologies Inc.", Part Number=CONMHF1-SMD-G-T, PCB DECAL=CONMHF1-SMD-G-T, Prefered Vender=Digikey, Revision=A, Type=Connector
C1 C2 C3 C4 C5 C6 C7 C8 C9 C10 C11 C12 C13 C14 C15 C16 C17 C18 C19 C20 C21 C22 C23 C24 C34 C63 C64 C65 C66 C67 C68 C69 C70 C71 C72 C73: "CAP CER 0.1UF 16V X7R 0201", Aligni Value=0.1u, Manufacturer="Murata Electronics", Part Number=GRM033Z71C104KE14D, Geometry.Height=0.33mm, PCB DECAL=RC0201, Prefered Vender=Digikey, Revision=A, Type=Capacitor
C25 C27 C28 C29 C36 C38 C40 C42 C44 C48: "CAP CER 1UF 6.3V X7R 0402", Aligni Value=1u, Manufacturer="Murata Electronics", Part Number=GRM155R70J105KA12D, Geometry.Height=0.33mm, PCB DECAL=RC0402, Prefered Vender=Digikey, Revision=A, Type=Capacitor
C26 C30 C31 C32 C33 C35 C49: "CAP CER 4.7UF 10V X5R 0402", Aligni Value=4.7u, Manufacturer="Samsung Electro-Mechanics", Part Number=CL05A475MP5NRNC, Geometry.Height=0.33mm, PCB DECAL=RC0402, Prefered Vender=Digikey, Revision=A, Type=Capacitor
C37 C39 C41 C43 C45 C46 C47: "CAP CER 100PF 16V X7R 0201", Aligni Value=100p, Manufacturer="Walsin Technology Corporation", Part Number=0201B101K160CT, Geometry.Height=0.33mm, PCB DECAL=RC0201, Prefered Vender=Digikey, Revision=A, Type=Capacitor
C50 C56 C57: "CAP CER 10PF 25V C0G/NP0 0201", Aligni Value=10p, Manufacturer="Walsin Technology Corporation", Part Number=0201N100J250CT, Geometry.Height=0.33mm, PCB DECAL=RC0201, Prefered Vender=Digikey, Revision=A, Type=Capacitor
C51 C52 C61 C62: "CAP CER 2PF 25V C0G/NP0 0201", Aligni Value=2p, Manufacturer="Samsung Electro-Mechanics", Part Number=CL03C020BA3GNNC, Geometry.Height=0.33mm, PCB DECAL=RC0201, Prefered Vender=Digikey, Revision=A, Type=Capacitor
C53 C54 C55: "NOP", Aligni Value=12p, Geometry.Height=0mm, Manufacturer=NOP, Part Number=NOP, PCB DECAL=RC0201, Prefered Vender=NOP, Revision=NOP, Type=Capacitor
C58 C59: "CAP CER 1.2PF 25V C0G/NP0 0201", Aligni Value=1.2P, Manufacturer="Murata Electronics", Part Number=GRM0335C1E1R2WA01D, Geometry.Height=0.33mm, PCB DECAL=RC0201, Prefered Vender=Digikey, Revision=A, Type=Capacitor
C60: "CAP CER 9PF 25V C0G 0201", Aligni Value=9p, Manufacturer="TDK Corporation", Part Number=CGA1A2C0G1E090D030BA, Geometry.Height=0.33mm, PCB DECAL=RC0201, Prefered Vender=Digikey, Revision=A, Type=Capacitor
L1: "POWER CHOKE MOLDED 2.2UH 1.9A", Aligni Value=2.2u, Manufacturer="Walsin Technology Corporation", Part Number=WLPH201610M2R2PP, Geometry.Height=1.5mm, PCB DECAL=RC0805, Prefered Vender=Digikey, Revision=A, Type=Inductor
L2 L3 L7: "INDUCTOR FIXED 1.5NH 0201", Aligni Value=1.5n, Manufacturer="Walsin Technology Corporation", Part Number=WLCM0603TGB1N5TB, Geometry.Height=1.5mm, PCB DECAL=RC0201, Prefered Vender=Digikey, Revision=A, Type=Inductor
L4 L5: "FIXED IND 2.5NH 500MA 200MOHM SM", Aligni Value=2.5n, Manufacturer="Murata Electronics", Part Number=LQP03TN2N5B02D, Geometry.Height=1.5mm, PCB DECAL=RC0201, Prefered Vender=Digikey, Revision=A, Type=Inductor
L6: "FIXED IND 1.8NH 200MA 550MOHM SM", Aligni Value=1.8n, Manufacturer="TE Connectivity Passive Product", Part Number=1-2176075-8, Geometry.Height=1.5mm, PCB DECAL=RC0201, Prefered Vender=Digikey, Revision=A, Type=Inductor
R1 R2: "RES 1K OHM 1% 1/20W 0201", Aligni Value=1k, Manufacturer="Stackpole Electronics Inc", Part Number=RMCF0201FT1K00, Geometry.Height=0.6mm, PCB DECAL=RC0201, Prefered Vender=Digikey, Revision=A, Type=Resistor
R3: "RES 100 OHM 1% 1/20W 0201", Aligni Value=100, Manufacturer=Yageo, Part Number=RC0201FR-07100RL, Geometry.Height=0.5mm, PCB DECAL=RC0201, Prefered Vender=Digikey, Revision=A, Type=Resistor
R4 R10 R11 R22: "RES 22 OHM 1% 1/20W 0201", Aligni Value=22, Manufacturer=Yageo, Part Number=RC0201FR-0722RL, Geometry.Height=0.5mm, PCB DECAL=RC0201, Prefered Vender=Digikey, Revision=A, Type=Resistor
R5 R8 R14 R15 R17 R18 R20 R21: "RES 4.7K OHM 1% 1/20W 0201", Aligni Value=4.7k, Manufacturer=Yageo, Part Number=RC0201FR-074K7L, Geometry.Height=0.5mm, PCB DECAL=RC0201, Prefered Vender=Digikey, Revision=A, Type=Resistor
R6 R7 R13 R16: "RES SMD 10K OHM 1% 1/20W 0201", Aligni Value=10k, Manufacturer=Yageo, Part Number=RC0201FR-0710KP, Geometry.Height=0.5mm, PCB DECAL=RC0201, Prefered Vender=Digikey, Revision=A, Type=Resistor
R9 R12: "RES 50 OHM 0.1% 0.075W 0201", Aligni Value=50, Manufacturer="Vishay Dale", Part Number=TNPW020150R0BEED, Geometry.Height=0.5mm, PCB DECAL=RC0201, Prefered Vender=Digikey, Revision=A, Type=Resistor
R19: "NOP", Aligni Value=NOP, Geometry.Height=0mm, Manufacturer=NOP, Part Number=NOP, PCB DECAL=RC0201, Prefered Vender=NOP, Revision=A, Type=Resistor
R23: "RES 24.3K OHM 1% 1/20W 0201", Aligni Value=24.3k, Manufacturer=YAGEO, Part Number=RC0201FR-0724K3L, Geometry.Height=0.6mm, PCB DECAL=RC0201, Prefered Vender=Digikey, Revision=A, Type=Resistor
R24: "RES SMD 5.1K OHM 1% 1/20W 0201", Aligni Value=5.1k, Manufacturer=YAGEO, Part Number=AC0201FR-075K1L, Geometry.Height=0.6mm, PCB DECAL=RC0201, Prefered Vender=Digikey, Revision=A, Type=Resistor
S1: "O2S SHIELD", Manufacturer="RYSE Inc.", Geometry.Height=0mm, Part Number=O2S-SHIELD, PCB DECAL=O2S-SHIELD, Prefered Vender=Digikey, Revision=A, Type="Electronic OEM Component"
U1: "580Mhz 32bits Networking Processor", Manufacturer="MediaTek Inc", Geometry.Height=0mm, Part Number=MT7688AN, PCB DECAL=DR-QFN-128, Type=IC
U4: "RX TXRX MODULE WIFI U.FL SMD", Manufacturer="Onion Corporation", Part Number=OM-O2S, Geometry.Height=0mm, PCB DECAL=OMEGA2S+PCB, Prefered Vender=Digikey, Revision=A, Type="Electronic OEM Component"
X3: "CRYSTAL 40.0000MHZ 12PF SMD", Aligni Value=40Meg, Manufacturer="Raltron Electronics", Geometry.Height=0.9mm, Part Number=R2520-40.000-12-F-1010-TR-NS1, PCB DECAL=R2520-40.000-12-F-1010-TR-NS1, Prefered Vender=Digikey, Revision=A, Type=Crystal
U2: PCB DECAL=TWBGA-84_8X12P5_ISI
U3: PCB DECAL=WIN_E-8_WIN

## Via types
v1: diameter 0.254, hole 0.127, Top to Bottom, 397 vias

## Nets (pads, with @x,y where several pads share a name; then routed paths per layer and width w, separated by ;. In a path a pad name is that pad's centre, name@x,y a point inside that pad or via, vN(x,y) a via of type N, cw(c..) or ccw(c..) an arc to the next point about the centre after c; other vN are vias at no path point)
1V2: C20.1 C21.1 C22.1 C23.1 C24.1 C30.1 C31.1 C63.2 L1.2 U1.22 U1.58 U1.89 U1.91 U1.122 U1.131 U1.145 | length 8.6
  Top w0.203: C23.1@-8.5,2.325 -8.103,2.325 -8.015,2.413 v1(-8.001,2.413) ; v1@-7.964,2.45 U1.58@-6.6,2.45 ; U1.89@-2.85,-3.8 -2.85,-4.35 -2.718,-4.482 v1(-2.718,-4.496) ; C22.1@-2.8,-5.202 -2.8,-4.589 v1@-2.718,-4.508 ; v1(-2.379,-4.371) -2.379,-4.357 -2.35,-4.328 U1.91@-2.35,-3.8 ; v1@-2.363,-4.379 -2.379,-4.394 -2.379,-4.833 -2.256,-4.956 -2.256,-5.202 -2.225,-5.233 C20.1@-2.2,-5.233 ; U1.22@-1.1,7.32 -1.1,6.739 v1@-1.092,6.731 ; C24.1@-0.9,9.325 -0.894,9.32 -0.894,9.073 v1(-0.889,9.068) ; v1(3.886,0.711) 3.892,0.706 4.514,0.706 U1.131@4.52,0.7 ; v1@3.925,4.175 3.95,4.2 U1.145@4.52,4.2 ; U1.122@5.4,-1.55 5.446,-1.596 5.912,-1.596 5.975,-1.659 v1(5.989,-1.659) ; v1(6.299,4.242) 6.313,4.242 6.417,4.346 6.712,4.346 6.735,4.37 C21.1@6.735,4.42 ; v1(6.426,0.711) 6.44,0.711 6.494,0.765 6.712,0.765 6.735,0.788 C63.2@6.735,0.838
  other v1: 5.425,-6.299 5.425,-5.918 7.7,-5.7 5.41,-5.512 7.7,-5.2 5.41,-5.131 7.7,-4.7 7.7,-4.2 3.9,4.2 -1.092,6.706
1V8: C1.1 C2.1 C3.1 C6.1 C7.1 C8.1 C9.1 C10.1 C26.1 C27.1 C64.1 C65.1 C66.1 C67.1 C68.1 C69.1 C70.1 C71.1 C72.1 C73.1 U1.79 U1.98 U1.116 U1.125 U2.A1 U2.A9 U2.C1 U2.C3 U2.C7 U2.C9 U2.E1 U2.E9 U2.G1 U2.G3 U2.G7 U2.G9 U2.J1 U2.J9 U2.M9 U2.R1 | length 24.3
  Top w0.203: v1(-8.509,-4.826) -8.505,-4.83 -8.505,-5.12 C3.1@-8.5,-5.125 ; C1.1@-8.5,-4.075 -8.45,-4.075 v1(-8.361,-3.986) ; v1(-8.354,-9.119) -8.344,-9.119 -8.15,-8.925 C9.1@-8.1,-8.925 ; C71.1@-8.1,-14.975 -8.094,-14.98 -7.524,-14.98 v1(-7.518,-14.986) ; C72.1@-8.1,-13.475 -8.094,-13.469 -7.754,-13.469 v1(-7.747,-13.462) ; C73.1@-8.1,-11.975 -8.05,-11.975 -8.027,-11.998 -8.027,-12.335 -7.979,-12.383 v1(-7.979,-12.397) ; U2.R1@-6.7,-8.9 -6.688,-8.888 -6.688,-8.467 v1(-6.678,-8.457) ; C10.1@-6.225,-16.6 -6.224,-16.599 v1(-6.223,-16.18) v1(-6.223,-16.18) ; v1(-5.738,-3.877) -5.728,-3.867 -5.398,-3.867 -5.35,-3.819 U1.79@-5.35,-3.8 ; v1(-5.385,-16.205) -5.38,-16.21 -5.38,-16.595 C70.1@-5.375,-16.6 ; U2.M9@-4.3,-15.3 -4.272,-15.3 -3.99,-15.582 v1(-3.976,-15.582) ; C67.1@-3.975,-16.6 -3.969,-16.594 -3.969,-16.211 v1(-3.962,-16.205) ; v1(-2.131,-8.611) -2.131,-8.624 -1.9,-8.855 U2.J1@-1.9,-8.9 ; v1(-1.905,-15.697) -1.903,-15.695 -1.903,-15.302 U2.J9@-1.9,-15.3 ; C69.1@-1.075,-16.6 -1.071,-16.596 -1.071,-16.209 v1(-1.067,-16.205) ; v1(-0.655,-9.271) -0.655,-9.263 -0.3,-8.908 U2.G1@-0.3,-8.9 ; v1(-0.612,-2.413) -0.606,-2.419 -0.606,-2.914 U1.98@-0.6,-2.92 ; v1(-0.343,-10.932) -0.334,-10.922 -0.334,-10.534 U2.G3@-0.3,-10.5 ; U2.G9@-0.3,-15.3 -0.289,-15.311 -0.289,-15.713 v1(-0.279,-15.723) ; U2.G7@-0.3,-13.7 -0.275,-13.675 -0.275,-13.333 v1(-0.265,-13.324) ; C68.1@0.325,-16.6 0.328,-16.597 0.328,-16.259 v1(0.33,-16.256) ; v1(1.295,-15.697) 1.298,-15.695 1.298,-15.302 U2.E9@1.3,-15.3 ; U2.E1@1.3,-8.9 1.311,-8.889 1.311,-8.493 v1(1.321,-8.484) ; C8.1@1.725,-16.6 1.726,-16.599 v1(1.727,-16.256) v1(1.727,-16.256) ; U2.C9@2.9,-15.3 2.902,-15.3 3.223,-15.621 v1(3.226,-15.621) ; U2.C7@2.9,-13.7 2.9,-13.755 3.09,-13.945 3.09,-14.108 v1(3.1,-14.117) ; U2.C3@2.9,-10.5 2.9,-10.549 3.258,-10.907 3.258,-10.943 v1(3.268,-10.953) ; U2.C1@2.9,-8.9 2.902,-8.902 2.902,-9.266 v1(2.904,-9.268) ; C7.1@3.225,-16.6 v1(3.226,-16.256) ; v1(3.886,-2.134) 3.893,-2.14 3.893,-2.913 U1.116@3.9,-2.92 ; v1(3.988,-0.787) 3.994,-0.794 4.514,-0.794 U1.125@4.52,-0.8 ; U2.A9@4.5,-15.3 4.826,-15.626 v1@4.826,-15.646 ; U2.A1@4.521,-8.89 4.526,-8.895 5.278,-8.895 v1(5.283,-8.89) ; v1(5.8,-15.95) 5.814,-15.95 5.839,-15.925 C2.1@6.225,-15.925 ; v1(5.842,-14.478) 5.844,-14.476 6.199,-14.476 C65.1@6.2,-14.475 ; v1(5.842,-12.979) 5.844,-12.977 6.198,-12.977 C64.1@6.2,-12.975 ; v1(5.842,-9.982) 5.851,-9.991 6.191,-9.991 C6.1@6.2,-10 ; v1(5.867,-11.481) 5.87,-11.478 6.212,-11.478 6.225,-11.465 6.367,-11.465 6.377,-11.475 ; v1(6.655,-0.992) 6.665,-1.002 6.665,-1.421 C26.1@6.782,-1.538 ; v1(7.976,-0.838) 7.985,-0.848 7.985,-1.201 C27.1@8.13,-1.346
  Bottom w0.203: v1(-0.612,-2.413) -0.619,-2.42 -0.619,-2.623 -0.661,-2.664 -0.661,-4.41 -0.66,-4.579 -0.579,-4.66 v1@-0.579,-4.674 ; v1@4.011,-0.787 6.45,-0.787 v1(6.655,-0.992) 6.809,-0.838 v1(7.976,-0.838)
  other v1: 4.801,-15.621 -0.533,-4.699
3V3: C14.1 C15.1 C16.1 C17.1 C18.1 C19.1 C25.1 C28.1 C29.1 C32.1 C33.1 C34.1 C35.1 C36.1 C37.1 C38.1 C39.1 C40.1 C41.1 C42.1 C43.1 C44.1 C45.1 C46.1 C47.1 C48.1 C49.1 C50.1 R5.2 R9.2 R12.2 R13.2 R14.2 R16.2 R20.1 R21.1 U1.8 U1.14 U1.15 U1.23 U1.32 U1.38 U1.41 U1.53 U1.60 U1.117 U1.123 U1.124 U1.134 U1.146 U1.149 U1.150 U1.154 U1.155 U4.C17 U4.C18 | length 29.2
  Top w0.203: C14.1@-8.9,5.125 -8.897,5.128 -8.563,5.128 v1(-8.56,5.131) ; C16.1@-8.9,6.975 -8.892,6.967 -8.517,6.967 v1(-8.509,6.96) ; C34.1@-8.5,1.775 -8.477,1.798 -8.054,1.798 -7.998,1.854 -7.971,1.854 -7.827,1.998 -7.028,1.998 -7.026,1.996 -6.646,1.996 U1.60@-6.6,1.95 ; R5.2@-8.5,13.125 -8.497,13.128 -8.157,13.128 v1(-8.153,13.132) ; v1(-7.899,8.179) C35.1@-7.899,8.676 ; v1(-5.791,9.017) -5.796,9.021 -5.796,9.302 -5.775,9.322 C17.1@-5.747,9.322 ; U1.53@-5.72,3.7 v1(-5.1,3.7) ; U1.41@-5.72,6.7 v1@-5.162,6.7 ; v1(-5.512,7.341) -5.498,7.341 -5.477,7.32 U1.38@-5.1,7.32 ; C15.1@-3.9,9.325 -3.85,9.325 -3.827,9.302 -3.827,9.149 -3.734,9.056 v1(-3.734,9.042) ; v1(-3.607,6.706) -3.603,6.709 -3.603,7.317 U1.32@-3.6,7.32 ; R21.1@-2.7,9.875 -2.692,9.883 v1@-2.692,10.16 ; v1(-1.524,9.042) -1.514,9.052 -1.514,9.311 C19.1@-1.5,9.325 ; R20.1@0.279,9.876 v1(0.279,10.211) ; U1.15@0.65,8.2 0.653,8.203 0.653,8.818 0.711,8.876 0.711,8.904 0.765,8.957 0.765,9.303 0.815,9.303 C43.1@0.838,9.326 ; v1(0.889,6.68) 0.895,6.686 0.895,7.314 U1.14@0.9,7.32 ; C42.1@1.9,10.65 1.904,10.646 2.435,10.646 v1(2.438,10.643) ; C46.1@2.057,9.326 2.066,9.318 v1@2.066,9.069 ; U1.8@2.4,7.32 2.4,6.642 v1@2.413,6.629 ; C47.1@2.667,9.326 2.717,9.326 2.74,9.303 2.74,9.129 2.837,9.032 v1(2.837,9.018) ; v1(3.658,8.915) 3.667,8.925 3.667,9.005 3.862,9.199 R9.2@3.912,9.199 ; v1@3.975,5.175 4.495,5.175 U1.149@4.52,5.2 ; U1.117@4.15,-3.8 4.15,-3.766 4.198,-3.718 4.754,-3.718 5.232,-3.24 v1(5.232,-3.226) ; U1.123@4.52,-1.3 4.566,-1.254 4.893,-1.254 5.051,-1.096 5.354,-1.096 U1.124@5.4,-1.05 5.446,-1.096 5.807,-1.096 5.981,-1.27 v1(5.994,-1.27) ; U1.155@4.52,6.7 v1(4.521,7.087) ; v1(4.597,8.915) 4.599,8.917 4.599,9.198 R12.2@4.6,9.199 ; U1.134@5.4,1.45 5.401,1.449 v1(5.918,1.448) v1(5.918,1.448) ; U1.146@5.4,4.45 5.949,4.45 v1(6.172,4.674) 6.172,4.679 6.393,4.9 C18.1@6.725,4.9 ; U1.150@5.4,5.45 6.071,5.45 6.108,5.486 6.135,5.486 6.237,5.588 C41.1@6.735,5.588 ; U1.154@5.4,6.45 6.004,6.45 6.082,6.528 6.11,6.528 6.338,6.756 C39.1@6.735,6.756 ; R14.2@5.486,11.476 v1(5.486,11.76) ; R16.2@5.939,-7.391 v1@6.325,-7.391 ; v1(6.36,6.143) 6.37,6.153 6.716,6.153 C37.1@6.757,6.194 ; v1(6.375,-7.391) C50.1@6.685,-7.391 ; v1(6.437,7.33) 6.442,7.335 6.712,7.335 6.741,7.365 C45.1@6.741,7.381 ; v1(7.504,-2.936) 7.513,-2.926 7.513,-2.908 C25.1@7.932,-2.489 C25.1@7.932,-2.389 ; v1(8.001,1.6) 8.011,1.59 8.011,1.201 C29.1@8.037,1.175 ; C28.1@8.142,-0.229 8.321,-0.408 8.321,-0.701 v1(8.331,-0.711) ; C33.1@8.15,3.5 8.152,3.502 8.152,3.986 v1(8.153,3.988) ; C40.1@8.15,4.521 C40.1@8.15,4.6 8.152,4.602 8.152,5.104 v1(8.153,5.105) ; C36.1@8.15,5.766 C36.1@8.15,5.7 8.169,5.719 8.169,6.188 v1(8.179,6.198) ; C38.1@8.15,6.909 C38.1@8.15,6.8 8.152,6.802 8.152,7.313 v1(8.153,7.315) ; C44.1@8.15,8.026 C44.1@8.15,7.9 8.152,7.902 8.152,8.406 v1(8.153,8.407) ; C32.1@8.153,2.235 8.321,2.067 8.321,1.788 v1(8.331,1.778) ; C48.1@8.2,-9.55 8.901,-9.55 8.927,-9.576 v1(8.941,-9.576) ; C49.1@8.2,-8.45 8.204,-8.454 8.937,-8.454 v1(8.941,-8.458)
  other v1: -7.989,1.85 3.9,5.2 6.121,5.486 6.096,6.528 2.413,6.655 -5.156,6.706 0.711,8.89 2.066,9.044 -2.692,10.185
ANT_OUT: A1.1 C62.1 L7.2 U4.C2 | length 6.7
  Top w0.092: L7.2@3.8,14.775 3.85,14.775 4.271,14.354 4.271,14.304 4.376,14.199 C62.1@4.47,14.199 ; C62.1@4.4,14.225 5.995,14.225 A1.1@6.02,14.249 ; A1.1@6,14.5 6.156,14.656 9.702,14.656 U4.C2@9.982,14.936
DDR_1V8: C11.1 R1.2 | length 1.2
  Top w0.203: C11.1@-1.009,-7.284 -0.995,-7.298 -0.995,-7.863 -0.979,-7.879 v1(-0.979,-7.893) ; C11.1@-1,-7.275 R1.2@-0.4,-7.275
DDR_A0: U1.80 U2.M8 | length 22.8
  Top w0.092: v1(-5.707,-3.161) -5.695,-3.161 -5.526,-2.993 -5.525,-2.993 -5.452,-2.92 U1.80@-5.1,-2.92 ; v1(-5.511,-15.799) -5.467,-15.799 -5.345,-15.921 -4.865,-15.921 -4.651,-15.708 -4.651,-14.851 -4.318,-14.518 U2.M8@-4.318,-14.503
  Inner3 w0.079: v1(-5.707,-3.161) -5.741,-3.195 -5.741,-3.406 -6.071,-3.736 -6.071,-4.115 -6.071,-4.28 -5.987,-4.363 -5.777,-4.363 -5.693,-4.446 -5.693,-4.612 -5.777,-4.696 -6.241,-4.696 -6.325,-4.779 -6.325,-4.945 -6.241,-5.028 -5.777,-5.028 -5.693,-5.112 -5.693,-5.278 -5.777,-5.361 -6.241,-5.361 -6.325,-5.444 -6.325,-5.611 -6.241,-5.694 -6.154,-5.694 -6.071,-5.777 -6.071,-5.817 -6.071,-5.854 -6.294,-6.078 -6.294,-7.75 -6.159,-7.885 -6.159,-8.5 -6.166,-8.508 -6.166,-9.704 -6.565,-10.102 -6.706,-10.243 -6.706,-10.579 -6.622,-10.662 -6.535,-10.662 -6.452,-10.745 -6.452,-10.911 -6.535,-10.994 -6.622,-10.994 -6.706,-11.078 -6.706,-12.575 -6.622,-12.658 -6.535,-12.658 -6.452,-12.742 -6.452,-12.908 -6.535,-12.991 -6.876,-12.991 -6.96,-13.074 -6.96,-13.241 -6.876,-13.324 -6.535,-13.324 -6.452,-13.407 -6.452,-13.574 -6.535,-13.657 -6.876,-13.657 -6.96,-13.74 -6.96,-13.906 -6.876,-13.989 -6.535,-13.989 -6.452,-14.073 -6.452,-14.239 -6.535,-14.322 -6.876,-14.322 -6.96,-14.405 -6.96,-14.572 -6.876,-14.655 -6.535,-14.655 -6.452,-14.738 -6.452,-14.905 -6.535,-14.988 -6.876,-14.988 -6.96,-15.071 -6.96,-15.237 -6.876,-15.321 -6.789,-15.321 -6.706,-15.404 -6.706,-15.443 -6.706,-15.543 -6.45,-15.799 v1(-5.511,-15.799)